# Altium PCB 3DP-GLCD.PcbDoc
Units mm, origin at the board's own origin, x right, y up, seen from the top; angles counter-clockwise.
Board outline 95 x 47 mm, 2 copper layers (Top Layer, Bottom Layer); 14 components, 37 nets, 114 pads, 0 vias.
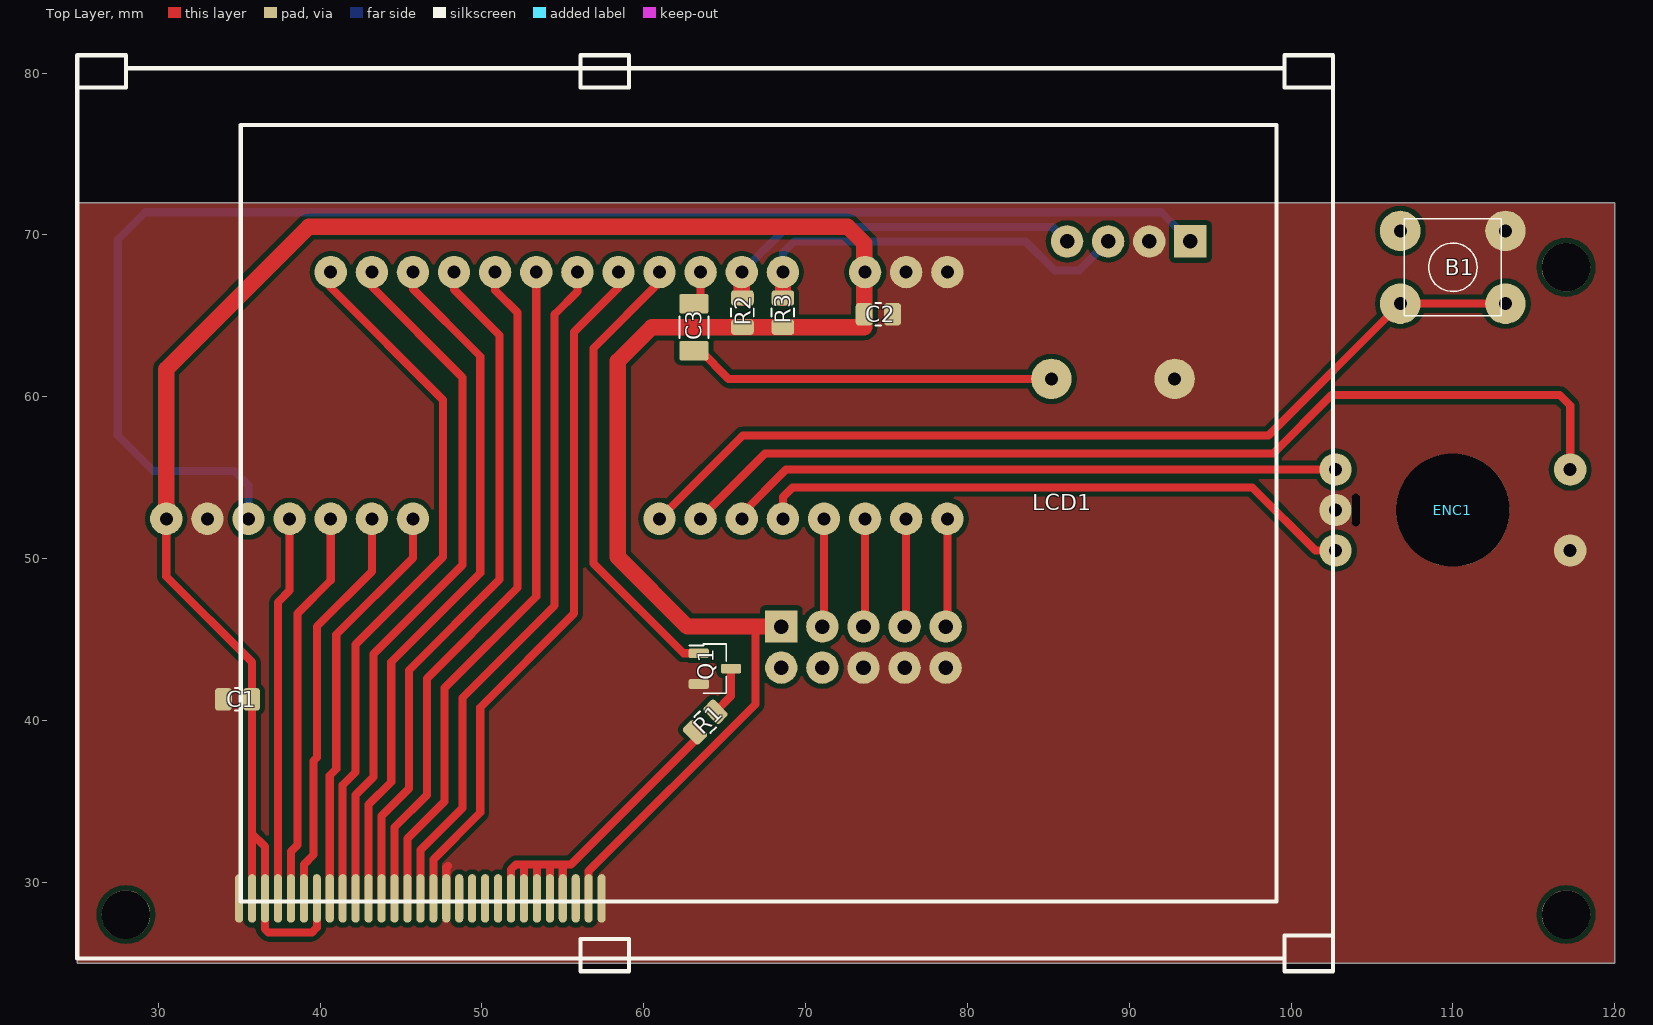
[diagram p0: Top Layer view]
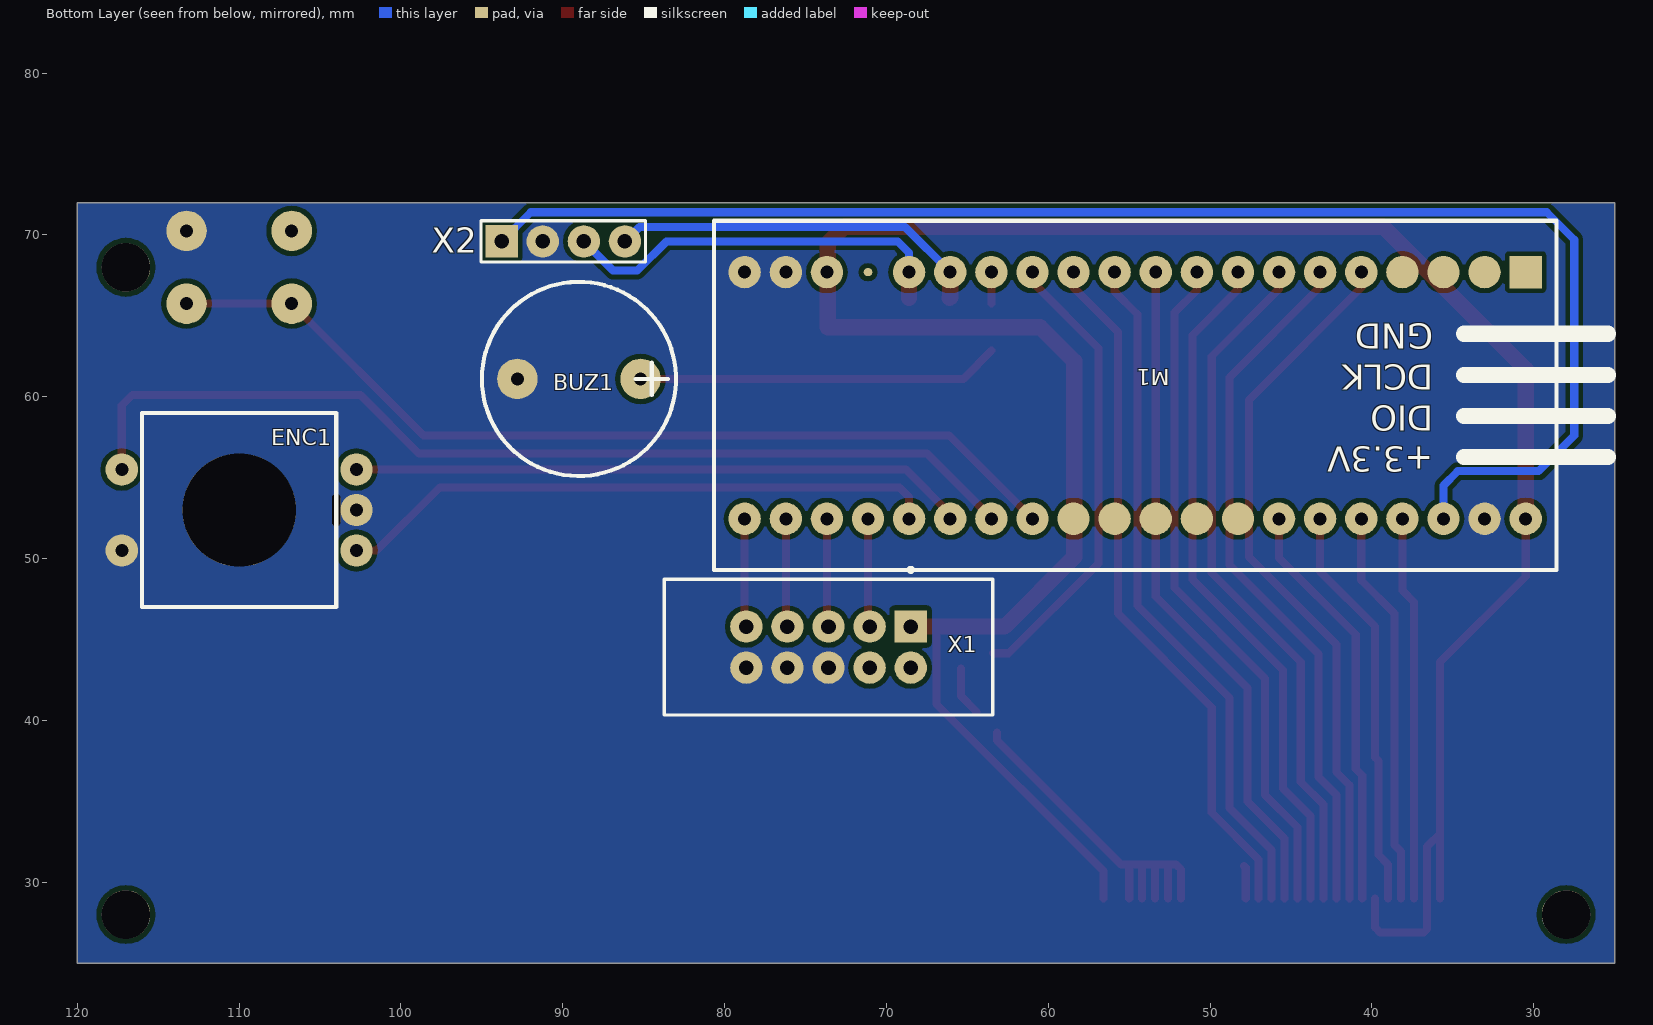
[diagram p1: Bottom Layer view, seen from below]
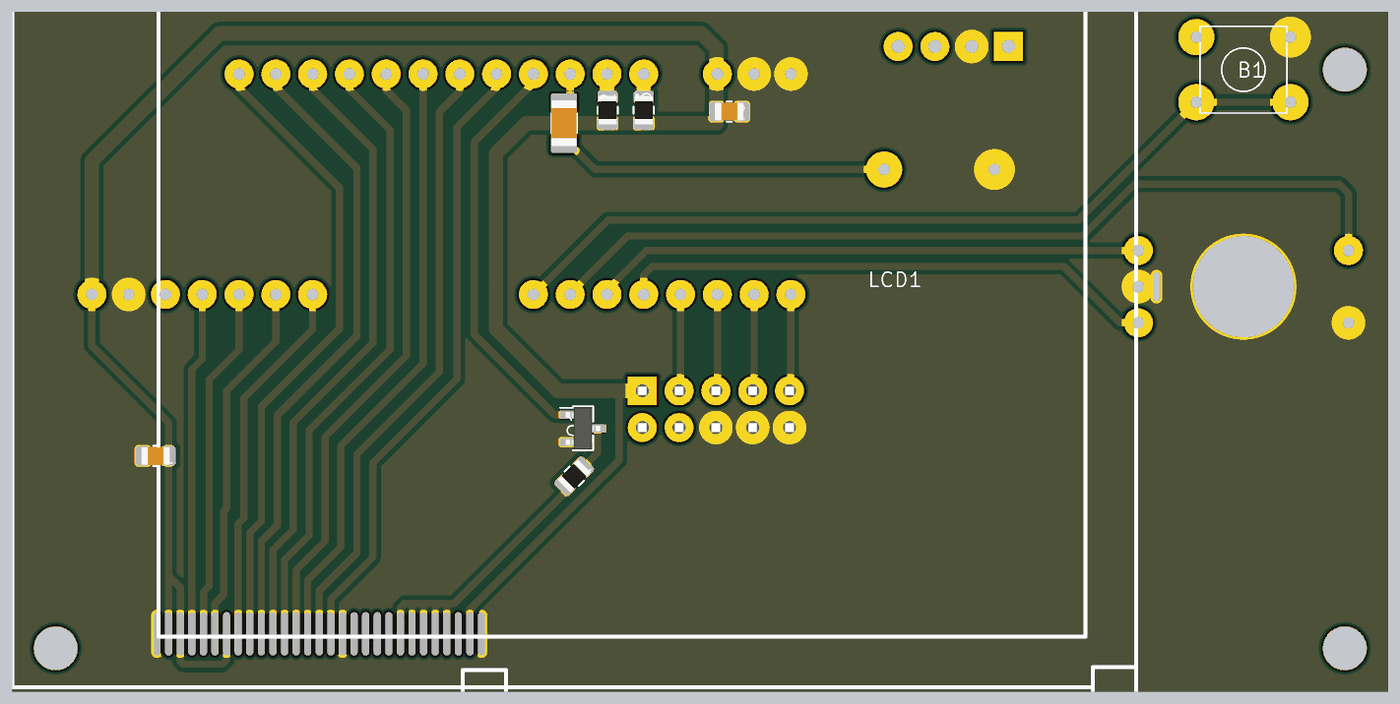
[diagram p2: 3D render of the assembled board from above, using the file's embedded part models]

## Layer stack, top to bottom
Top Layer: signal copper 0.0356
Dielectric: dielectric 0.32, FR-4, Dk 4.8
Bottom Layer: signal copper 0.0356

## Board outline
25,25 120,25 120,72 25,72

## Design rules (kind name [scope] priority, off if disabled: settings)
Clearance Clearance_1 [InPolygon] p1: gap=0.3
Clearance [All] p2: gap=0.2
ComponentClearance [All] p1 off: gap=0.254 collisioncheckmode=3 verticalgap=0.254 showdistances=FALSE
FabricationTestPointUsage [All] p1 off: valid=0 allowmultiple=FALSE
FabricationTestpoint [All] p1 off: side=3 testpointundercomponent=TRUE minsize=1.016 maxsize=2.54 preferedsize=1.524 minholesize=0 maxholesize=1.016 preferedholesize=0.813 testpointgrid=0.025 allowsidetop=TRUE allowsidebottom=TRUE usegrid=TRUE gridtolerance=0
FanoutControl Fanout_BGA [IsBGA] p1 off: bgadir=Out bgaviamode=Centered fanoutstyle=Auto fanoutdirection=Alternating viagrid=0.025 // Fanout_BGA (Default Rule)
FanoutControl Fanout_LCC [IsLCC] p2 off: bgadir=Out bgaviamode=Centered fanoutstyle=Auto fanoutdirection=Alternating viagrid=0.025 // Fanout_LCC (Default Rule)
FanoutControl Fanout_SOIC [IsSOIC] p3 off: bgadir=Out bgaviamode=Centered fanoutstyle=Auto fanoutdirection=Alternating viagrid=0.025 // Fanout_SOIC (Default Rule)
FanoutControl Fanout_Small [(CompPinCount < 5)] p4 off: bgadir=Out bgaviamode=Centered fanoutstyle=Auto fanoutdirection=OutThenIn viagrid=0.025 // Fanout_Small (Default Rule)
FanoutControl Fanout_Default [All] p5 off: bgadir=Out bgaviamode=Centered fanoutstyle=Auto fanoutdirection=Alternating viagrid=0.025 // Fanout_Default (Default Rule)
PolygonConnect [All] p1: connectstyle=Relief reliefconductorwidth=0.5 reliefentries=4 polygonreliefangle="90 Angle" airgapwidth=-0.1
RoomDefinition 3DP-GLCD [InComponentClass('3DP-GLCD')] p1: confinementstyle=ConfineOut formatcopy=TRUE lockcomponents=FALSE outline 105.7,75.7 115.9,75.7 115.9,78.5 105.7,78.5
RoutingVias [All] p1: holewidth=0.711 width=1.27 viastyle="Through Hole" minholewidth=0.711 minwidth=1.27 maxholewidth=0.711 maxwidth=1.27
SilkToSilkClearance [All] p1 off: silktosilkclearance=0.254
SilkscreenOverComponentPads [IsPad] p1 off: minsilkscreentomaskgap=0.254
SolderMaskExpansion [All] p1: expansion=0.16
Width [All] p1: maxlimit=2 minlimit=0.2 preferedwidth=0.3
18 further rules are at their usual default settings.

## Components (designator, comment, footprint, x,y, rotation, side; value= is the part's Value field where it differs from the comment)
B1 "SWT-2-x" SWT-2-x 110,68 r180 top
BUZ1 "Buzer" Buzer_12xx 89,61.1 r0 bottom
C1 "Cap" C0805_Murata 34.9,41.3 r180 top
C2 "Cap" C0805_Murata 74.5,65.1 r0 top
C3 "Cap" C1206_Murata 63.1,64.3 r270 top
ENC1 "Encoder" Encoder_bot 110,53 r0 top
LCD1 "ILI9325" LCD-ILI9325-29pin-top 35,29 r0 top locked
M1 "Arduino-STM32" ARDUINO-STM32 30.5,67.7 r0 bottom locked
Q1 "IRLML6344" SOT23-3_IR 64.4,43.2 r0 top
R1 "R" R0805_UniOhm 63.8,39.9 r45 top
R2 "R" R0805_UniOhm 66.1,65.2 r90 top
R3 "R" R0805_UniOhm 68.6,65.2 r90 top
X1 "BH-10" BH-10 68.5,45.8 r0 bottom
X2 "Header 4" HDR1X4 93.78,69.6 r180 bottom

## Footprints (in the part's own frame and the unit in brackets; to place one, negate y for a bottom-side part, rotate by r counter-clockwise, add the part's x,y. Pads: shape width x height; smd on the part's side, far side on the other; paste and mask are expansions set on the pad)
ARDUINO-STM32 [mm]
  rect 2x2 smd: 1(0,0)
  round 2 smd: 2(2.54,0) 3(5.08,0) 4(7.62,0) 29(27.94,15.24) 30(25.4,15.24) 31(22.86,15.24) 32(20.32,15.24) 33(17.78,15.24)
  round 2 hole 0.8: 5(10.16,0) 6(12.7,0) 7(15.24,0) 8(17.78,0) 9(20.32,0) 10(22.86,0) 11(25.4,0) 12(27.94,0) 13(30.48,0) 14(33.02,0) 15(35.56,0) 16(38.1,0) 18(43.18,0) 19(45.72,0) 20(48.26,0) 21(48.26,15.24) 22(45.72,15.24) 23(43.18,15.24) 24(40.64,15.24) 25(38.1,15.24) 26(35.56,15.24) 27(33.02,15.24) 28(30.48,15.24) 34(15.24,15.24) 35(12.7,15.24) 36(10.16,15.24) 37(7.62,15.24) 38(5.08,15.24) 39(2.54,15.24) 40(0,15.24)
  oval 0.54x0.5 smd: 17(40.64,0)
  silkscreen extent -5.08,-3.17 50.17,18.41
BH-10 [mm] "Shrouded Header,vertical,2.54mm pitch;1.00mm lead width,10 pins,2 rows,5 pins per row,20.30mm L X 8.40mm W X 9.30mm H body"
  rect 2x2 hole 0.9: 1(0,0)
  round 2 hole 0.9: 2(0,2.54) 3(2.54,0) 4(2.54,2.54) 5(5.08,0) 6(5.08,2.54) 7(7.62,0) 8(7.62,2.54) 9(10.16,0) 10(10.16,2.54)
  silkscreen extent -5.07,-3.63 15.23,5.47, body extent -5.07,-3.13 15.23,5.97, height 9.3
Buzer_12xx [mm]
  round 2.5 hole 0.8: 1(-3.81,0) 2(3.81,0)
  silkscreen extent -6,-6 6,6
C0805_Murata [mm] "Capacitor, Chip; 2.00 mm L X 1.25 mm W X 1.40 mm H body"
  rrect40% 1.05x1.4 smd paste-0.025 mask+0.05: 1(-0.875,0) 2(0.875,0)
  silkscreen extent -0.17,-0.7 0.17,0.7, body extent -1,-0.63 1,0.63, height 1.4
C1206_Murata [mm] "Capacitor, Chip; 3.20 mm L X 1.60 mm W X 1.80 mm H body"
  rrect20% 1.2x1.8 smd: 1(-1.45,0) 2(1.45,0)
  silkscreen extent -0.67,-0.9 0.67,0.9, body extent -1.6,-0.9 1.6,0.9, height 1.6
Encoder_bot [mm]
  oval 0.5x2 hole 0.5 slot 2 at 90 deg: 0(-6,0)
  round 7 hole 7: 0(0,0)
  round 2 hole 0.8: 1(-7.25,2.5) 2(-7.25,0) 3(-7.25,-2.5) 4(7.25,2.5) 5(7.25,-2.5)
HDR1X4 [mm] "Connector; Header; 4 Position"
  rect 2x2 hole 0.9: 1(0,0)
  round 2 hole 0.9: 2(2.54,0) 3(5.08,0) 4(7.62,0)
  silkscreen extent -1.27,-1.27 8.89,1.27
LCD-ILI9325-29pin-top [mm]
  oval 0.5x3 smd: 1(0,0) 2(0.8,0) 3(1.6,0) 4(2.4,0) 5(3.2,0) 6(4,0) 7(4.8,0) 8(5.6,0) 9(6.4,0) 10(7.2,0) 11(8,0) 12(8.8,0) 13(9.6,0) 14(10.4,0) 15(11.2,0) 16(12,0) 17(12.8,0) 18(13.6,0) 19(14.4,0) 20(15.2,0) 21(16,0) 22(16.8,0) 23(17.6,0) 24(18.4,0) 25(19.2,0) 26(20,0) 27(20.8,0) 28(21.6,0) 29(22.4,0)
  silkscreen extent -10,-4.5 67.6,52.1
R0805_UniOhm [mm] "Resistor, Chip; 2.00 mm L X 1.275 mm W X 0.65 mm H body"
  rrect40% 0.95x1.4 smd paste-0.025 mask+0.05: 1(-0.9,0) 2(0.9,0)
  silkscreen extent -0.25,-0.7 0.25,0.7, body extent -1,-0.64 1,0.64, height 0.65
SOT23-3_IR [mm] "Small Outline Transistor (SOT23), 0.95 mm pitch; 3 pin, 2.92 mm L X 1.30 mm W X 1.12 mm H body"
  rrect40% 1.25x0.6 smd paste-0.025 mask+0.05: 1(-1,0.95) 2(-1,-0.95) 3(1,0)
  silkscreen extent -1.57,-1.52 0.7,1.52, body extent -1.18,-1.46 1.18,1.46, height 1.12
SWT-2-x [mm] "Button"
  round 2.5 hole 0.8: 1(-3.25,2.25) 2(-3.25,-2.25) 3(3.25,-2.25) 4(3.25,2.25)
  silkscreen extent -3,-3 3,3

## Part data
C1 C2: library part GRM21BR71H104KA01L
C3: library part GRM31CR71H475KA12L
ENC1: "Rotary Encoder with button"
LCD1: library part LCD-ILI9325-29pin, "TFT LCD"
M1: library part ARDUINO-STM32
Q1: library part IRLML6344TRPBF, "30 V, 5.0 A, 0.029 Ohm Single N-Channel HEXFET Power MOSFET"
R1: library part 0805S8F4700T50
R2 R3: "Resistor"
X1: library part BH-10_2
X2: "Header, 4-Pin"

## Free pads (board coordinates)
  round 3 hole 3: 1(28,28) 1(117,28) 2(117,68)

## Nets (pads, with @x,y where several pads share a name; then routed paths per layer and width w, separated by ;. In a path a pad name is that pad's centre, name@x,y a point inside that pad or via, vN(x,y) a via of type N, cw(c..) or ccw(c..) an arc to the next point about the centre after c; other vN are vias at no path point)
+3.3V: C1.1 C2.1 LCD1.2 LCD1.3 LCD1.7 LCD1.28 M1.18 M1.40 R2.1 R3.1 X1.1 | length 159.9
  Top Layer w0.5: M1.40@30.5,52.76 M1.40 30.5,48.9 35.8,43.6 35.8,33 ; LCD1.2 35.8,33 ; LCD1.7 39.8,27.2 39.5,26.9 36.8,26.9 36.6,27.1 LCD1.3 36.6,32.2 35.8,33 ; LCD1.28 56.6,30.7 66.9,41 66.9,45.7 66.8,45.8
  Top Layer w1: M1.40@30.5,52.76 30.5,61.7 39.3,70.5 72.6,70.5 73.625,69.475 C2.1 73.625,64.3 60.5,64.3 58.4,62.2 58.4,50.1 62.7,45.8 66.8,45.8 X1.1
+5V: M1.38 X2.1 | length 91.2
  Bottom Layer w0.5: M1.38 35.58,54.52 34.7,55.4 29.7,55.4 27.5,57.6 27.5,69.7 29.2,71.4 91.98,71.4 X2.1
B1: B1.1 B1.4 M1.28 | length 57.8
  Top Layer w0.5: M1.28 66.12,57.6 98.6,57.6 B1.4 B1.1
B2: M1.29
B3: M1.30
B4: M1.31
B5: M1.32
BEEP: C3.1 M1.14 | length 2.2
  Top Layer w0.5: C3.1@63.52,65.77 M1.14 M1.14@63.52,68
CONTRAST: M1.13 Q1.1 | length 28.8
  Top Layer w0.5: M1.13@60.98,68 M1.13 60.98,67.08 56.9,63 56.9,49.7 62.45,44.15 Q1.1
CS-: LCD1.4 M1.37 | length 24.1
  Top Layer w0.5: LCD1.4 37.4,47.3 38.12,48.02 M1.37 M1.37@38.12,52.76
CS_2: M1.21 X1.9 | length 6.9
  Top Layer w0.5: X1.9@78.76,45.9 M1.21 M1.21@78.76,52.76
D10: LCD1.9 M1.5 | length 44.4
  Top Layer w0.5: M1.5@40.66,68 M1.5 40.66,66.74 47.6,59.8 47.6,50.1 42.2,44.7 42.2,36.8 41.4,36 LCD1.9
D11: LCD1.10 M1.6 | length 44.1
  Top Layer w0.5: LCD1.10 42.2,35.4 43.3,36.5 43.3,44.1 48.8,49.6 48.8,61.2 43.2,66.8 M1.6 M1.6@43.2,68
D12: LCD1.11 M1.7 | length 43.6
  Top Layer w0.5: LCD1.11 43,34.8 44.4,36.2 44.4,43.6 49.9,49.1 49.9,62.5 45.74,66.66 M1.7 M1.7@45.74,68
D13: LCD1.12 M1.8 | length 43.2
  Top Layer w0.5: LCD1.12 43.8,34.1 45.5,35.8 45.5,43.1 51.1,48.7 51.1,63.8 48.28,66.62 M1.8 M1.8@48.28,68
D14: LCD1.13 M1.9 | length 42.7
  Top Layer w0.5: LCD1.13 44.6,33.4 46.6,35.4 46.6,42.6 52.2,48.2 52.2,65.2 50.82,66.58 M1.9 M1.9@50.82,68
D15: LCD1.14 M1.10 | length 42.3
  Top Layer w0.5: LCD1.14 45.4,32.7 47.7,35 47.7,42 53.36,47.66 M1.10 M1.10@53.36,68
D16: LCD1.15 M1.11 | length 43
  Top Layer w0.5: LCD1.15 46.2,32 48.8,34.6 48.8,41.4 54.5,47.1 54.5,65.1 55.9,66.5 M1.11 M1.11@55.9,68
D17: LCD1.16 M1.12 | length 43.7
  Top Layer w0.5: LCD1.16 47,31.4 49.9,34.3 49.9,40.8 55.7,46.6 55.7,64 58.44,66.74 M1.12 M1.12@58.44,68
GND: B1.2 BUZ1.2 C1.2 C2.2 ENC1.0 ENC1.2 ENC1.5 LCD1.1 LCD1.17 LCD1.29 M1.19 M1.20 M1.39 Q1.2 X1.6 X1.8 X1.10 X2.2 | length 2
  Top Layer w0.5: LCD1.17 47.8,30.9 47.9,31
MISO_2: M1.23 X1.5 | length 6.9
  Top Layer w0.5: X1.5@73.68,45.9 M1.23 M1.23@73.68,52.76
MOSI_2: M1.24 X1.3 | length 6.9
  Top Layer w0.5: X1.3@71.14,45.9 M1.24 M1.24@71.14,52.76
NetB1_1: 
NetBUZ1_1: BUZ1.1 C3.2 | length 22.4
  Top Layer w0.5: C3.2@63.5,62.85 65.25,61.1 BUZ1.1
NetENC1_1: ENC1.1 M1.26 | length 37.8
  Top Layer w0.5: M1.26@66.06,52.76 68.8,55.5 ENC1.1
NetENC1_3: ENC1.3 M1.25 | length 37.1
  Top Layer w0.5: M1.25@68.6,52.76 68.6,53.8 69.2,54.4 97.6,54.4 101.5,50.5 ENC1.3
NetENC1_4: ENC1.4 M1.27 | length 61
  Top Layer w0.5: M1.27@63.52,52.76 63.76,52.76 67.5,56.5 98.9,56.5 102.5,60.1 116.6,60.1 117.25,59.45 ENC1.4
NetLCD1_22: LCD1.22 LCD1.23 LCD1.24 LCD1.25 LCD1.26 R1.1 | length 25.4
  Top Layer w0.5: LCD1.22 51.8,30.8 52.1,31.1 54.2,31.1 ; LCD1.23 52.6,31.1 ; LCD1.24 53.4,31.1 ; LCD1.25 54.2,31.1 ; LCD1.26 55,31.1 ; R1.1 63.164,38.764 55.5,31.1 54.2,31.1
NetQ1_3: Q1.3 R1.2 | length 3.1
  Top Layer w0.5: R1.2 65.4,41.5 Q1.3
RS-: LCD1.5 M1.36 | length 24.8
  Top Layer w0.5: LCD1.5 38.2,31.9 38.6,32.3 38.6,46.6 40.66,48.66 M1.36 M1.36@40.66,52.76
RST-: LCD1.8 M1.34 | length 25.9
  Top Layer w0.5: LCD1.8 40.6,36.6 41,37 41,45.3 45.74,50.04 M1.34 M1.34@45.74,52.76
SCK_2: M1.22 X1.7 | length 6.9
  Top Layer w0.5: X1.7@76.22,45.9 M1.22 M1.22@76.22,52.76
SCL: M1.15 R2.2 X2.4 | length 23.9
  Top Layer w1: M1.15 66.06,66.14 R2.2
  Bottom Layer w0.5: M1.15@66.06,67.04 M1.15 68.86,70.5 85.26,70.5 X2.4
SD_CS: X1.4
SD_DETECT: X1.2
SDA: M1.16 R3.2 X2.3 | length 24.7
  Top Layer w1: R3.2 M1.16
  Bottom Layer w0.5: M1.16 68.6,68.9 69.3,69.6 83.6,69.6 85.4,67.8 86.9,67.8 X2.3
WR-: LCD1.6 M1.35 | length 25.5
  Top Layer w0.5: LCD1.6 39,31.1 39.6,31.7 39.6,37.5 39.8,37.7 39.8,45.8 43.2,49.2 M1.35 M1.35@43.2,52.76
pads on no net: B1.3 LCD1.18 LCD1.19 LCD1.20 LCD1.21 LCD1.27 M1.1 M1.2 M1.3 M1.4 M1.17 M1.33

## Polygon pours and split planes (outlines as drawn)
GND on Bottom Layer "Top Layer-No Net" (solid, remove dead copper, pour order 8): 25,25 120,25 120,72 25,72
GND on Top Layer "Top Layer-No Net" (solid, remove dead copper, pour order 10): 25,25 120,25 120,72 25,72

## Other copper
Top Layer:
  pour cut-out: 62.9,40.1 62.651,40.179 63.521,41.049 64.1,40.47 64.1,40.2 63.9,40.2 63.4,39.7
  pour cut-out: 64,43.8 63.905,43.542 64.6,43.55 64.6,43.8
  pour cut-out: 69.6,66 69.6,64.6 69.2,64.6 69.1,64.5

## Silkscreen, mask and mechanical layers (free items; w line width, h text height)
OutBoard:
  the board outline again, w0.254

## Text inside footprints (layer, text, board x,y; h text height)
M1: Bottom Overlay "+3.3V" at 36.215,56.905 h1.52 r180; Bottom Overlay "DIO" at 36.215,59.445 h1.52 r180; Bottom Overlay "DCLK" at 36.215,61.985 h1.52 r180; Bottom Overlay "GND" at 36.215,64.525 h1.52 r180